# Altium PCB VESC_909.PcbDoc
Units mm, origin at the board's own origin, x right, y up, seen from the top; angles counter-clockwise.
Board outline 69.22 x 40.39 mm, 4 copper layers (Top Layer, Signal Layer 1, Signal Layer 2, Bottom Layer), stack 0.778 mm thick; 111 components, 90 nets, 408 pads, 455 vias.
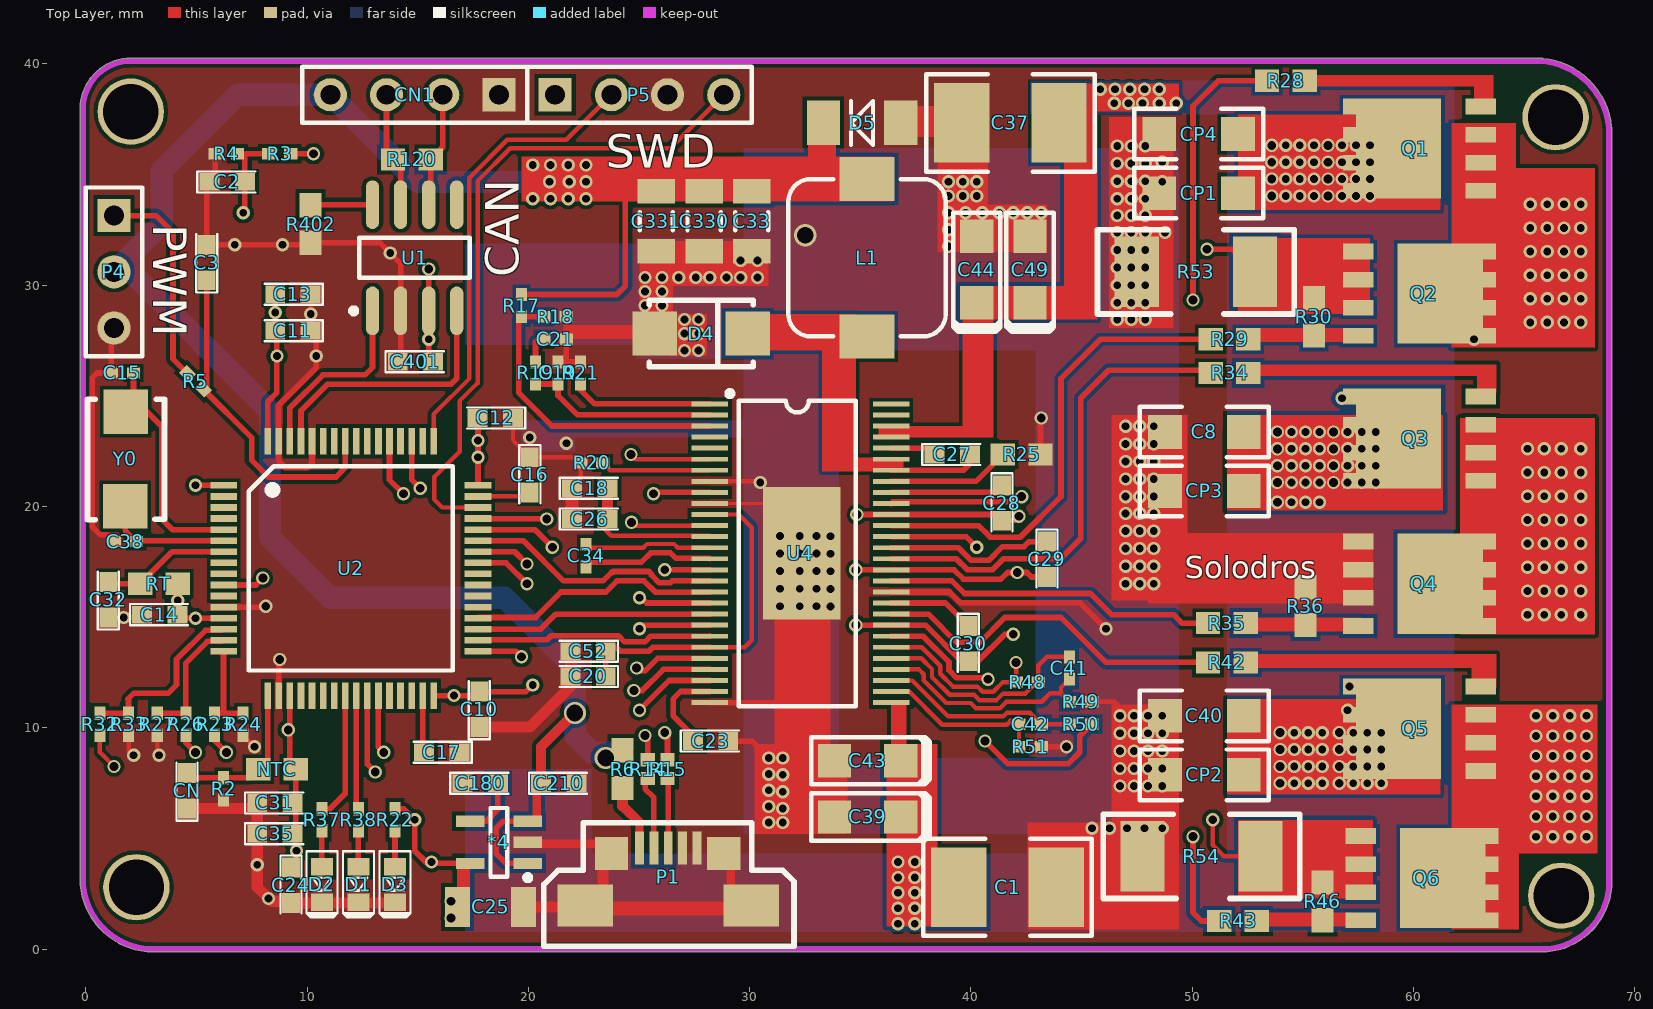
[diagram p0: Top Layer view]
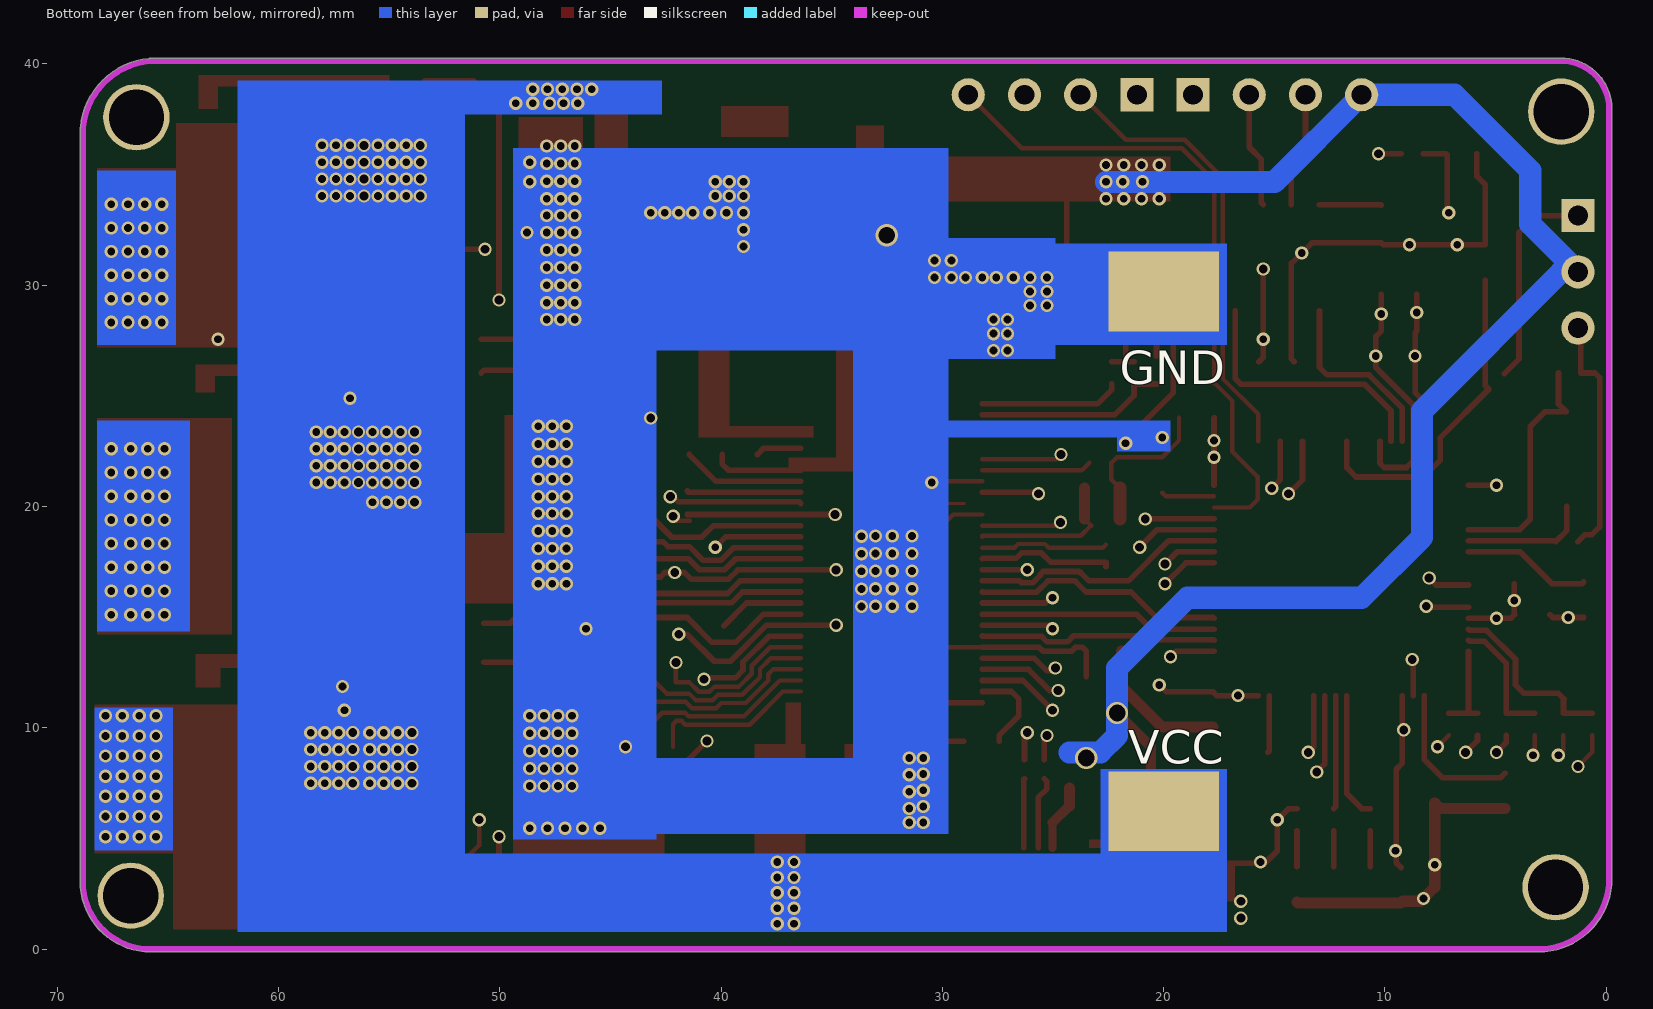
[diagram p1: Bottom Layer view, seen from below]
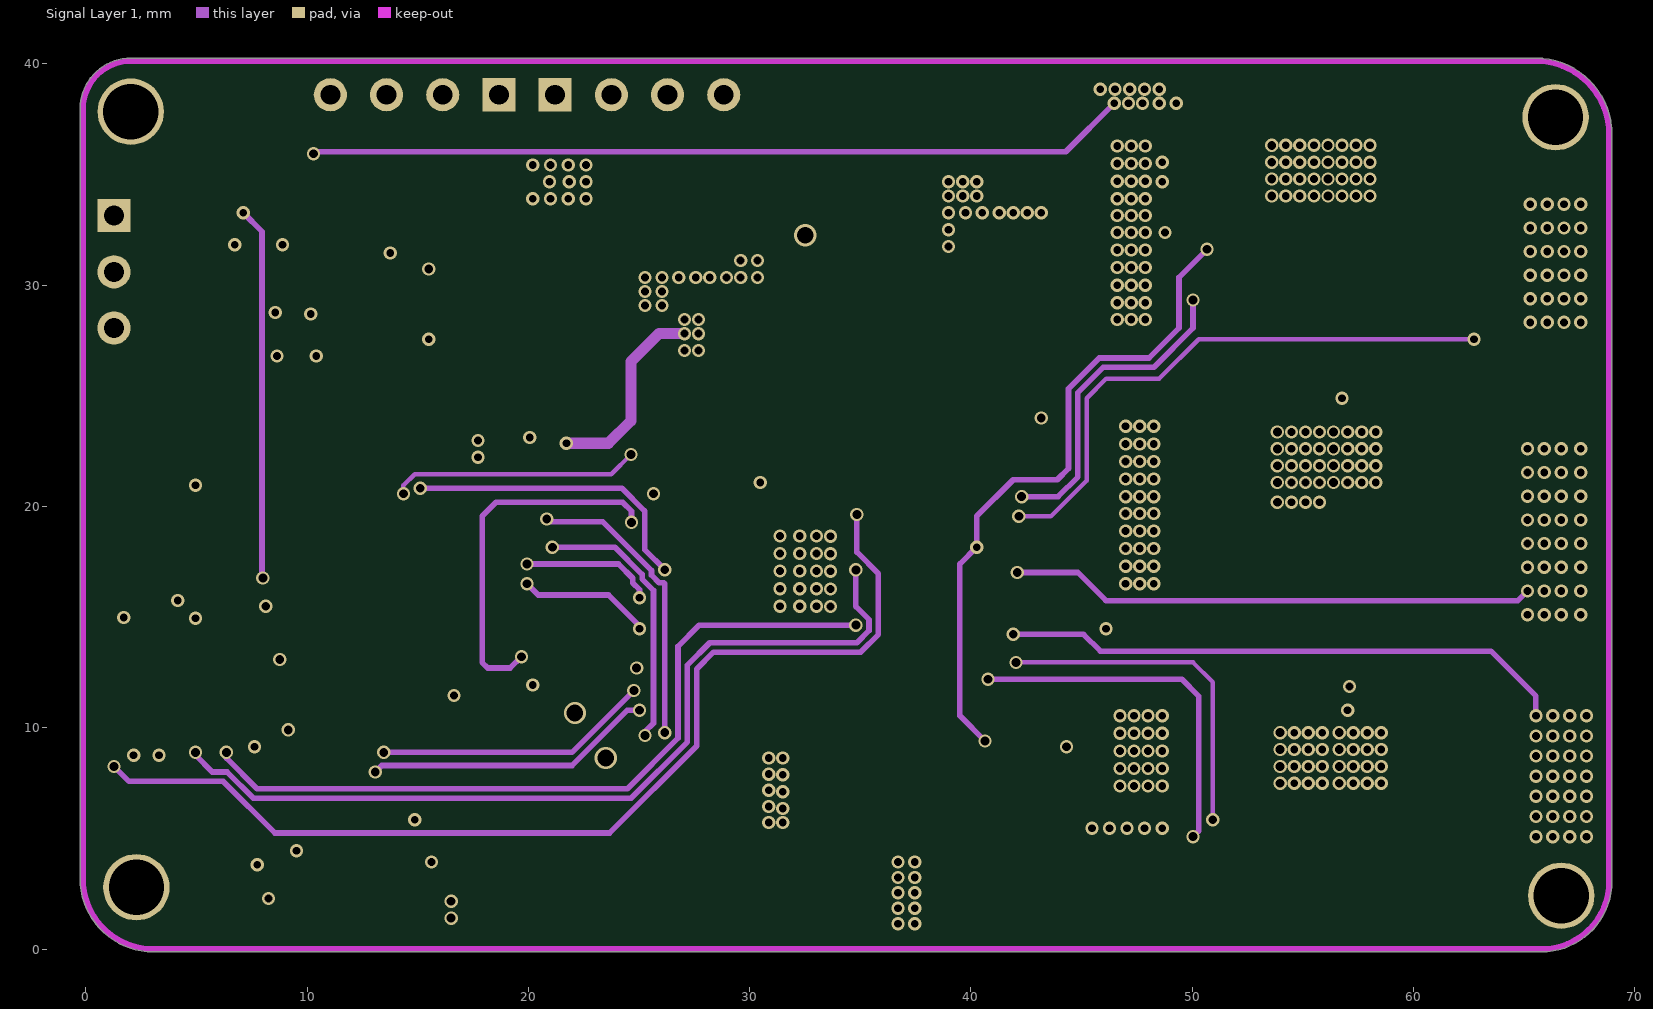
[diagram p2: Signal Layer 1]
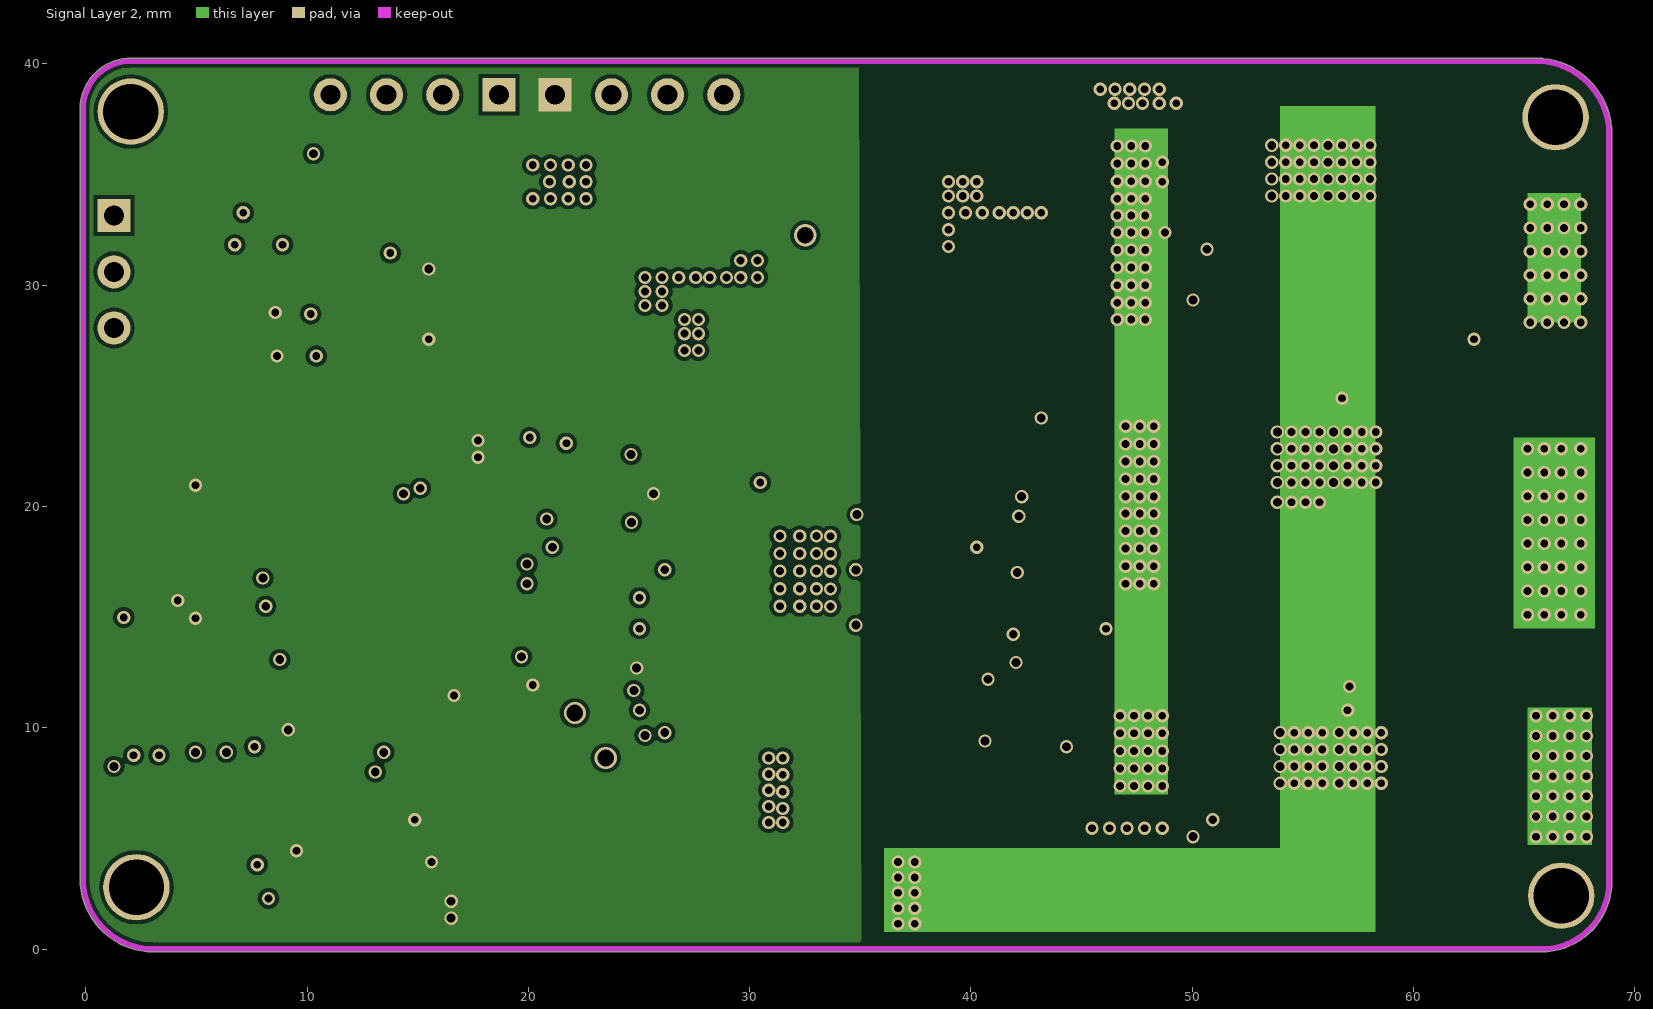
[diagram p3: Signal Layer 2]

## Layer stack, top to bottom
Top Solder: solder mask 0.0102, Solder Resist, Dk 3.5
Top Layer: signal copper 0.0356
Dielectric 1: core 0.254, FR-4, Dk 4.2
Signal Layer 1: signal copper 0.036
Dielectric 3: prepreg 0.127, Dk 4.2
Signal Layer 2: signal copper 0.036
Dielectric 2: core 0.254, Dk 4.2
Bottom Layer: signal copper 0.0356
Bottom Solder: solder mask 0.0102, Solder Resist, Dk 3.5

## Board outline
-0.254,3.175 -0.254,37.973 cw(c2.032,37.973) 2.032,40.259 65.786,40.259 cw(c65.786,40.132) 65.845,40.245 cw(c65.532,36.83) 68.947,37.143 cw(c68.834,37.084) 68.961,37.084 68.961,3.048 cw(c65.786,3.048) 65.786,-0.127 3.048,-0.127 cw(c3.048,3.175)

## Design rules (kind name [scope] priority, off if disabled: settings)
Clearance [All] p1: gap=0.17 ignorepadtopadclearanceinfootprint=FALSE except(0: Arc-Hole Track-Hole SMDPad-Hole THPad-Hole Via-Hole Fill-Hole Poly-Hole Region-Hole Text-Hole)
ComponentClearance [All] p1: gap=0 collisioncheckmode=3 verticalgap=0 showdistances=FALSE
PlaneConnect [All] p1: planeconnectstyle=Direct reliefexpansion=0.508 reliefentries=4 reliefconductorwidth=0.254 reliefairgap=0.254
PolygonConnect [All] p1: connectstyle=Direct reliefconductorwidth=0.254 reliefentries=4 polygonreliefangle="90 Angle" airgapwidth=0.254
RoutingVias [All] p1: holewidth=0.4 width=0.6 viastyle="Through Hole" minholewidth=0.35 minwidth=0.6 maxholewidth=5 maxwidth=66
SolderMaskExpansion [All] p1: expansion=0.102
Width [All] p1: maxlimit=8 minlimit=0.18 preferedwidth=0.254
28 further rules are at their usual default settings.

## Classes and differential pairs
component class TEMP: CN NTC R2
component class STM32F405: C10 C11 C12 C13 C14 C15 C16 C17 C31 C32 C35 C38 P5 RT U2 Y0
component class SN65HVD232: C401 R120 R402 U1
component class MAIN: C2 C3 CN1 D1 D2 D3 P1 P4 R3 R4 R5 R6 R14 R15 R22 R37 R38 R53 R54
component class IRFS7530: Q1 Q2 Q3 Q4 Q5 Q6 R28 R29 R30 R34 R35 R36 R42 R43 R46
component class DRV8302: *4 C1 C8 C18 C19 C20 C21 C23 C24 C25 C26 C27 C28 C29 C30 C33 C34 C37 C39 C40 C41 C42 C43 C44 C49 C52 C180 C210 C330 C331 CP1 CP2 CP3 CP4 D4 D5 L1 R17 R18 R19 R20 R21 R23 R24 R25 R26 R27 R32 R33 R48 R49 R50 R51 U4

## Components (designator, comment, footprint, x,y, rotation, side; value= is the part's Value field where it differs from the comment)
*4 "MIC5219" SOT23-5 18.669,4.826 r0 top
C1 "10UF" 1812 41.656,2.794 r180 top
C2 "CAP" C-0603 5.588,34.671 r0 top
C3 "220PF" C-0603 5.461,30.226 r90 top
C8 "10UF" 1206 50.546,23.368 r0 top
C10 "2.2UF" C-0603 17.78,10.033 r90 top
C11 "2.2UF" C-0603 10.16,27.94 r180 top
C12 "2.2UF" C-0603 19.304,24.003 r180 top
C13 "2.2UF" C-0603 10.16,29.591 r180 top
C14 "2.2UF" C-0603 2.54,15.113 r0 top
C15 "15PF" 0402 1.651,26.035 r180 top
C16 "2.2UF" C-0603 20.066,22.225 r270 top
C17 "2.2UF" C-0603 16.891,8.89 r180 top
C18 "2.2UF" C-0603 21.971,20.828 r0 top
C19 "120PF" 0402 21.336,26.035 r270 top
C20 "2.2UF" C-0603 23.495,12.319 r180 top
C21 "6.8NF" 0402 21.209,27.559 r180 top
C23 "2.2UF" C-0603 27.432,9.398 r0 top
C24 "2.2UF" C-0603 9.271,3.683 r270 top
C25 "10UF" LC-1206 18.288,1.905 r0 top
C26 "2.2UF" C-0603 21.971,19.431 r0 top
C27 "100NF" C-0603 38.354,22.352 r0 top
C28 "220NF" C-0603 41.402,20.955 r270 top
C29 "220NF" C-0603 43.434,18.415 r270 top
C30 "220NF" C-0603 39.878,14.605 r270 top
C31 "2.2UF" C-0603 7.747,6.604 r0 top
C32 "100NF" C-0603 1.016,14.986 r90 top
C33 "10UF" C1206 30.099,32.893 r270 top
C34 "22NF" 0402 22.606,17.78 r90 top
C35 "2.2UF" C-0603 7.747,5.207 r0 top
C37 "10UF" 1812 41.783,37.338 r0 top
C38 "15PF" 0402 1.778,18.415 r180 top
C39 "10UF" C1206A 36.83,5.969 r180 top
C40 "10UF" 1206 50.546,10.541 r180 top
C41 "2.2NF" 0402 44.45,12.7 r270 top
C42 "2.2NF" 0402 42.672,10.16 r0 top
C43 "10UF" C1206A 36.83,8.509 r180 top
C44 "10UF" C1206A 40.259,29.21 r90 top
C49 "10UF" C1206A 42.672,29.21 r90 top
C52 "2.2UF" C-0603 23.495,13.462 r180 top
C180 "100NF" C-0603 17.018,7.493 r0 top
C210 "10UF" C-0603 20.574,7.493 r0 top
C330 "10UF" C1206 27.94,32.893 r270 top
C331 "10UF" C1206 25.781,32.893 r270 top
C401 "2.2UF" C-0603 14.097,26.543 r0 top
CN "2.2UF" C-0603 4.572,6.35 r90 top
CN1 "HEAD-1X4" H-1X4 18.669,38.608 r180 top
CP1 "10UF" 1206 50.292,34.163 r180 top
CP2 "10UF" 1206 50.546,7.874 r180 top
CP3 "10UF" 1206 50.546,20.701 r180 top
CP4 "10UF" 1206 50.292,36.83 r180 top
D1 "红色" LED0603 12.319,2.921 r270 top
D2 "绿色" LED0603 10.668,2.921 r270 top
D3 "红色" LED0603 13.97,2.921 r270 top
D4 "D Schottky" LC-SMA(DO-214AC)_S1 27.813,27.813 r180 top
D5 "TVS" DIODE-1206 36.83,37.338 r180 top
L1 "Inductor" L-SMD-7 35.306,31.242 r90 top
NTC "NTC" 0603-2 8.636,8.128 r0 top
P1 "MICRO_USB" MicroUSB 25.019,4.572 r0 top
P4 "Header 3" HDR3X1_A 1.27,33.147 r270 top
P5 "Header 4" H-1X4 21.209,38.608 r0 top
Q1 "CSD18540Q5B" SON5X6 57.404,33.909 r0 top
Q2 "CSD18540Q5B" SON5X6 63.136,31.876 r180 top
Q3 "CSD18540Q5B" SON5X6 57.404,20.803 r0 top
Q4 "CSD18540Q5B" SON5X6 63.136,18.769 r180 top
Q5 "CSD18540Q5B" SON5X6 57.404,7.696 r0 top
Q6 "CSD18540Q5B" SON5X6 63.246,5.461 r180 top
R2 "10K" 0402 6.223,7.239 r90 top
R3 "39K" 0402 8.763,35.941 r180 top
R4 "2.2K" 0402 6.35,35.941 r0 top
R5 "2.2K" 0402 4.953,25.654 r135 top
R6 "0R" 0603-2 24.257,8.128 r90 top
R14 "22R" LC-0402 25.4,8.128 r90 top
R15 "22R" LC-0402 26.289,8.128 r90 top
R17 "18K" 0402 19.685,29.083 r90 top
R18 "3K3" 0402 21.209,28.575 r180 top
R19 "15K" 0402 20.32,26.035 r90 top
R20 "10K" 0402 22.86,21.971 r180 top
R21 "220K" 0402 22.352,26.035 r270 top
R22 "220R" 0402 13.97,5.842 r90 top
R23 "39K" 0402 5.817,10.16 r90 top
R24 "2.2K" 0402 7.112,10.16 r90 top
R25 "1M" 0603-2 42.291,22.352 r180 top
R26 "39K" 0402 4.521,10.16 r90 top
R27 "2.2K" 0402 3.226,10.16 r90 top
R28 "10R" 0603-2 54.229,39.243 r0 top
R29 "10R" 0603-2 51.689,27.559 r0 top
R30 "39K" 0603-2 55.499,28.575 r90 top
R32 "39K" 0402 0.635,10.16 r90 top
R33 "2.2K" 0402 1.93,10.16 r90 top
R34 "10R" 0603-2 51.689,26.035 r0 top
R35 "10R" 0603-2 51.562,14.732 r0 top
R36 "39K" 0603-2 55.118,15.494 r270 top
R37 "220R" 0402 10.668,5.842 r90 top
R38 "220R" 0402 12.319,5.842 r90 top
R42 "10R" 0603-2 51.562,12.954 r0 top
R43 "10R" 0603-2 52.07,1.27 r0 top
R46 "39K" 0603-2 55.88,2.159 r90 top
R48 "100R" 0402 42.545,12.065 r0 top
R49 "100R" 0402 44.958,11.176 r180 top
R50 "100R" 0402 44.958,10.16 r180 top
R51 "100R" 0402 42.672,9.144 r180 top
R53 "0.001R" 2512 54.61,32.512 r180 top
R54 "0.001R" 2512 54.864,6.096 r180 top
R120 "120R" 0603-2 14.732,35.687 r180 top
R402 "10K" 0603-2 10.16,32.766 r270 top
RT "10K" 0603-2 3.302,16.51 r0 top
U1 "SN65HVD232" SOIC8_N 14.859,31.242 r90 top
U2 "STM32F4R" STM32F4R 6.223,20.955 r0 top
U4 "DRV8302" HTSSOP-56 28.194,24.638 r270 top
Y0 "8MHz" XTAL_5032 3.556,19.431 r90 top

## Footprints (in the part's own frame and the unit in brackets; to place one, negate y for a bottom-side part, rotate by r counter-clockwise, add the part's x,y. Pads: shape width x height; smd on the part's side, far side on the other; paste and mask are expansions set on the pad)
0402 [mm] "Chip Capacitor, Body 1.0x0.5mm, IPC High Density"
  rect 0.6x0.5 smd: 1(-0.5,0) 2(0.5,0)
  body extent -0.55,-0.3 0.55,0.3, height 1.3
0603-2 [mm] "贴片无丝印"
  rect 1.1x1 smd: 1(-0.85,0) 2(0.85,0)
1206 [mil] "贴片元件"
  rect 60x60 smd: 1(-70,0) 2(70,0)
  silkscreen extent -115,-45 115,45, body extent -75,-35 75,35, height 39
1812 [mm] "保险丝"
  rect 2.5x3.6 smd: 1(-2.2,0) 2(2.2,0)
  silkscreen extent -3.81,-2.2 3.81,2.2, body extent -2.54,-1.65 2.67,1.65, height 1.2
2512 [mm]
  rect 2x3.2 smd: 1(1.778,1.905) 2(7.112,1.905)
  silkscreen extent 0,0 8.89,3.81
C1206 [mm] "Chip Capacitor, Body 3.2x1.6mm, IPC High Density"
  rect 1.1x1.7 smd: 1(-1.35,0) 2(1.35,0)
  silkscreen extent -0.4,-0.75 0.4,0.75, body extent -1.7,-0.9 1.7,0.9, height 1.3
C1206A [mm]
  rect 1.5x1.5 smd: 1(0,0) 2(3,0)
  silkscreen extent -1.32,-1.07 4.06,1.07, body extent -0.1,-0.81 3.1,0.79, height 0.95
C-0603 [mm]
  rect 0.9x0.8 smd: 1(0,0) 2(1.6,0)
  silkscreen extent -0.55,-0.48 2.08,0.47
DIODE-1206 [mm] "玻璃封装二极管"
  rect 1.5x2 smd: 1(0,0) 2(3.5,0)
  silkscreen extent 1.25,-1 2.25,1
H-1X4 [mm] "Connector; Header; 4 Position"
  rect 1.5x1.5 hole 0.9: 1(0,0)
  round 1.5 hole 0.9: 2(2.54,0) 3(5.08,0) 4(7.62,0)
  silkscreen extent -1.27,-1.27 8.89,1.27
HDR3X1_A [mm] "Connector; Header; 3 Position"
  rect 1.5x1.5 hole 0.9: 1(0,0)
  round 1.5 hole 0.9: 2(2.54,0) 3(5.08,0)
  silkscreen extent -1.27,-1.27 6.35,1.27
HTSSOP-56 [mm]
  rect 0.22x1.65 smd: 1(0,0) 2(0.5,0) 3(1,0) 4(1.5,0) 5(2,0) 6(2.5,0) 7(3,0) 8(3.5,0) 9(4,0) 10(4.5,0) 11(5,0) 12(5.5,0) 13(6,0) 14(6.5,0) 15(7,0) 16(7.5,0) 17(8,0) 18(8.5,0) 19(9,0) 20(9.5,0) 21(10,0) 22(10.5,0) 23(11,0) 24(11.5,0) 25(12,0) 26(12.5,0) 27(13,0) 28(13.5,0) 29(13.5,8.2) 30(13,8.2) 31(12.5,8.2) 32(12,8.2) 33(11.5,8.2) 34(11,8.2) 35(10.5,8.2) 36(10,8.2) 37(9.5,8.2) 38(9,8.2) 39(8.5,8.2) 40(8,8.2) 41(7.5,8.2) 42(7,8.2) 43(6.5,8.2) 44(6,8.2) 45(5.5,8.2) 46(5,8.2) 47(4.5,8.2) 48(4,8.2) 49(3.5,8.2) 50(3,8.2) 51(2.5,8.2) 52(2,8.2) 53(1.5,8.2) 54(1,8.2) 55(0.5,8.2) 56(0,8.2)
  rect 6x3.5 smd: 57(6.75,4.15)
  silkscreen extent -0.59,0.78 13.66,6.6
L-SMD-7 [mm] "贴片电感7*7"
  rect 2x2.5 smd: 1(-3.556,0) 2(3.556,0)
  silkscreen extent -3.56,-3.56 3.56,3.56, body extent -3.56,-3.56 3.56,3.56, height 4
LC-0402 [mm]
  rect 0.6x0.65 smd mask+0.051: 1(-0.425,0) 2(0.425,0)
LC-1206 [mm]
  rect 1.13x1.8 smd: 1(-1.49,0) 2(1.49,0)
LC-SMA(DO-214AC)_S1 [mm]
  rect 2x2 smd: 1(2.1,0) 2(-2.1,0)
  silkscreen extent -2.35,-1.5 2.35,1.5
LED0603 [mm]
  rect 0.8x1 smd: 1(-0.8,0) 2(0.8,0)
  silkscreen extent -1.5,-0.7 1.5,0.7
MicroUSB [mm]
  rect 2.5x1.9 smd: 0(-2.45,-2.6) 0(5.05,-2.6)
  rect 1.5x1.5 smd: 0(-1.27,-0.254) 0(3.81,-0.254)
  rect 0.4x1.5 smd: 1(0,0) 2(0.65,0) 3(1.3,0) 4(1.95,0) 5(2.6,0)
  silkscreen extent -4.32,-4.44 6.98,1.14
SOIC8_N [mm] "8-Pin Small Outline Integrated Circuit Package (SOIC8), IPC Medium Density"
  oval 2.2x0.6 smd: 1(-2.4,1.905) 2(-2.4,0.635) 3(-2.4,-0.635) 4(-2.4,-1.905) 5(2.4,-1.905) 6(2.4,-0.635) 7(2.4,0.635) 8(2.4,1.905)
  silkscreen extent -2.52,-2.5 0.9,2.88, body extent -1.95,-2.45 1.95,2.45, height 1.75
SON5X6 [mm]
  rect 1.372x0.71 smd: 1(5.636,0.355) 1(5.636,1.625) 1(5.636,2.895) 4(5.636,4.165)
  rect 0.59x0.71 smd: 8(-0.295,0.355) 8(-0.295,1.625) 8(-0.295,2.895) 8(-0.295,4.165)
  rect 3.85x4.52 smd: 8(1.925,2.26)
SOT23-5 [mm] "e.g. CAT6912, ADP150, AD8605, 5-Leads"
  rect 1.3x0.5 smd: 1(1.3,-0.95) 2(1.3,0) 3(1.3,0.95) 4(-1.3,0.95) 5(-1.3,-0.95)
  silkscreen extent -0.38,-1.72 1.43,1.55
STM32F4R [mm]
  rect 1.2x0.3 smd: 1(0,0) 2(0,-0.5) 3(0,-1) 4(0,-1.5) 5(0,-2) 6(0,-2.5) 7(0,-3) 8(0,-3.5) 9(0,-4) 10(0,-4.5) 11(0,-5) 12(0,-5.5) 13(0,-6) 14(0,-6.5) 15(0,-7) 16(0,-7.5) 33(11.5,-7.5) 34(11.5,-7) 35(11.5,-6.5) 36(11.5,-6) 37(11.5,-5.5) 38(11.5,-5) 39(11.5,-4.5) 40(11.5,-4) 41(11.5,-3.5) 42(11.5,-3) 43(11.5,-2.5) 44(11.5,-2) 45(11.5,-1.5) 46(11.5,-1) 47(11.5,-0.5) 48(11.5,0)
  rect 0.3x1.2 smd: 17(2,-9.5) 18(2.5,-9.5) 19(3,-9.5) 20(3.5,-9.5) 21(4,-9.5) 22(4.5,-9.5) 23(5,-9.5) 24(5.5,-9.5) 25(6,-9.5) 26(6.5,-9.5) 27(7,-9.5) 28(7.5,-9.5) 29(8,-9.5) 30(8.5,-9.5) 31(9,-9.5) 32(9.5,-9.5) 49(9.5,2) 50(9,2) 51(8.5,2) 52(8,2) 53(7.5,2) 54(7,2) 55(6.5,2) 56(6,2) 57(5.5,2) 58(5,2) 59(4.5,2) 60(4,2) 61(3.5,2) 62(3,2) 63(2.5,2) 64(2,2)
  silkscreen extent 1.14,-8.36 10.36,0.87
XTAL_5032 [mm]
  rect 2x2 smd: 1(4.851,1.753) 2(0.584,1.778)
  silkscreen extent -0.03,0 5.41,3.48

## Part data
C1 C3 C8 C10 C11 C12 C13 C14 C15 C16 C17 C18 C19 C20 C21 C23 C24 C26 C27 C28 C29 C30 C31 C32 C34 C35 C37 C38 C39 C40 C41 C42 C43 C44 C49 C52 C180 C210 C401 CN CP1 CP2 CP3 CP4: library part CAP, "Capacitor"
C2: "Capacitor"
C25 C33 C330 C331: library part "Cap Pol1", "Polarized Capacitor (Radial)"
CN1 P5: "Header, 4-Pin"
D1 D2 D3: library part LED2, "Typical RED, GREEN, YELLOW, AMBER GaAs LED"
D4: "Schottky Diode"
D5: "TVS保护"
NTC R2 R3 R4 R5 R6 R14 R15 R17 R18 R19 R20 R21 R22 R23 R24 R25 R26 R27 R28 R29 R30 R32 R33 R34 R35 R36 R37 R38 R42 R43 R46 R48 R49 R50 R51 R53 R54 R120 R402 RT: library part Res1, "贴片电阻"
P1: library part MINI_USB
P4: library part "Header 3_1", "接插件"
U1: library part AT24C02_1, "CAN收发器"
U4: "无刷直流驱动器"
Y0: library part XTAL, "Crystal Oscillator"

## Free pads (board coordinates)
  round 3 hole 2.5: 0(2.032,37.846) 1(2.286,2.794) 2(66.675,2.413) 3(66.421,37.592)
  rect 5x3.6 smd far side: 4(20,6.223) 5(20,29.718)

## Via types
v1: diameter 0.6, hole 0.35, Top Layer to Bottom Layer, 382 vias
v2: diameter 0.6, hole 0.4, Top Layer to Bottom Layer, 70 vias
v3: diameter 1, hole 0.75, Top Layer to Bottom Layer, 3 vias

## Nets (pads, with @x,y where several pads share a name; then routed paths per layer and width w, separated by ;. In a path a pad name is that pad's centre, name@x,y a point inside that pad or via, vN(x,y) a via of type N, cw(c..) or ccw(c..) an arc to the next point about the centre after c; other vN are vias at no path point)
+5V: *4.1 *4.3 C33.1 C210.1 C330.1 C331.1 CN1.4 D5.2 L1.2 P4.2 R6.2 R17.2 | length 83.3
  Top Layer w0.254: R17.2 23.995,29.583 24.384,29.972 24.384,33.909 24.718,34.243 C331.1 ; *4.1 18.984,3.876 18.542,4.318 18.542,5.461 18.857,5.776 *4.3
  Top Layer w0.45: C210.1 20.574,9.144 v3(22.098,10.668)
  Bottom Layer w1: v1(22.606,34.671) v1(21.844,34.671) v1(20.955,34.671) 14.986,34.671 CN1.4 6.858,38.608 3.429,35.179 3.429,32.766 P4.2 2.032,30.607 8.319,24.32 8.319,18.605 11.049,15.875 18.923,15.875 22.098,12.7 v3(22.098,10.668) 22.098,9.652 22.86,8.89 24.257,8.89
  other v1: 20.193,33.909 20.997,33.909 21.802,33.909 22.606,33.909 20.193,35.433 20.997,35.433 21.802,35.433 22.606,35.433
  other v3: 23.495,8.636
GND: *4.2 C1.1 C2.1 C3.2 C8.1 C10.1 C11.1 C12.1 C13.1 C14.1 C15.2 C16.1 C17.1 C18.1 C19.1 C20.2 C21.1 C23.2 C24.2 C25.2 C26.1 C31.1 C32.1 C33.2 C35.1 C37.1 C38.2 C39.2 C40.2 C43.2 C44.2 C49.2 C52.2 C180.1 C210.2 C330.2 C331.2 C401.1 CN1.1 CN.1 CP1.2 CP2.2 CP3.2 CP4.2 D1.2 D2.2 D3.2 D4.1 D5.1 P1.0 P1.4 P1.5 P4.3 P5.3 pad.5 Q4.1 R2.1 R4.1 R18.1 R20.2 R21.1 R24.1 R25.1 R27.1 R33.1 R36.1 R49.1 R51.1 R53.2 R54.2 R402.2 U1.2 U2.12 U2.18 U2.60 U2.63 U4.8 U4.10 U4.28 U4.39 U4.57 | length 109.3
  Top Layer w0.2: R33.1 1.93,8.992 v1(2.159,8.763) ; R27.1 3.226,8.839 v1(3.302,8.763) ; R24.1 7.112,9.652 v1(7.62,9.144) ; C12.1 19.304,22.987 C16.1 22.106,22.225 R20.2 22.36,21.217 C18.1 ; U4.8 30.424,21.138 v1(30.48,21.082) ; R49.1 46.482,11.176 46.736,10.922 ; v1@46.545,9.144 v1(46.736,8.954)
  Top Layer w0.254: C32.1 2.413,14.986 C14.1 ; P4.3 1.151,27.948 C15.2 0.508,26.035 0.297,25.824 0.297,19.076 0.655,18.718 0.975,18.718 C38.2 ; R4.1 5.85,34.933 C2.1 5.461,34.544 C3.2 10.07,31.826 R402.2 13.296,31.916 14.224,30.988 U1.2 14.224,26.67 C401.1 ; U2.12 8.089,15.455 v2(8.128,15.494) ; U2.18 8.723,13.041 v2(8.763,13.081) ; C13.1 C11.1 10.414,27.686 10.414,26.289 8.723,24.598 U2.63 8.723,22.054 9.017,21.76 10.033,21.76 10.223,21.95 U2.60 ; C19.1 21.717,26.535 ; R18.1 C21.1 21.709,26.543 21.717,26.535 ; R21.1 21.717,26.535 ; U4.28 31.331,11.138 31.369,11.176 ; C23.2 30.099,9.398 v1(30.861,8.636) ; U4.39 39.039,16.138 39.533,15.644 44.935,15.644 v1(46.101,14.478) ; R25.1 43.141,23.964 v2(43.18,24.003) ; R51.1 v2(44.323,9.144)
  Top Layer w0.5: CN.1 7.493,6.35 C31.1 C35.1 7.747,2.794 8.382,2.159 9.195,2.159 C24.2 13.932,2.083 D3.2 ; C10.1 20.066,10.033 21.895,11.862 C20.2 ; C52.2 21.895,12.751 21.971,12.827
  Top Layer w0.6: C26.1 C18.1
  Signal Layer 1 w0.5: v1(21.717,22.86) 23.622,22.86 24.638,23.876 24.638,26.543 25.908,27.813 v1(27.051,27.813)
  other v1: 8.255,2.286 7.747,3.81 45.466,5.461 46.26,5.461 47.053,5.461 47.847,5.461 48.641,5.461 30.861,5.715 31.496,5.715 31.496,6.35 30.861,6.445 31.496,7.112 30.861,7.175 46.736,7.366 47.371,7.366 48.006,7.366 48.641,7.366 31.496,7.874 30.861,7.906 46.736,8.16 47.371,8.16 48.006,8.16 48.641,8.16 31.496,8.636 47.371,8.954 48.006,8.954 48.641,8.954 46.736,9.747 47.371,9.747 48.006,9.747 48.641,9.747 46.736,10.541 47.371,10.541 48.006,10.541 48.641,10.541 1.714,14.986 33.655,15.481 31.369,15.494 32.258,15.494 33.02,15.494 31.369,16.288 32.258,16.288 33.02,16.288 33.655,16.275 46.99,16.51 47.625,16.51 48.26,16.51 31.369,17.081 32.258,17.081 33.02,17.081 33.655,17.068 46.99,17.304 47.625,17.304 48.26,17.304 33.655,17.862 31.369,17.875 32.258,17.875 33.02,17.875 46.99,18.098 47.625,18.098 48.26,18.098 33.655,18.656 31.369,18.669 32.258,18.669 33.02,18.669 46.99,18.891 47.625,18.891 48.26,18.891 46.99,19.685 47.625,19.685 48.26,19.685 46.99,20.447 47.625,20.447 48.26,20.447 46.99,21.241 47.625,21.241 48.26,21.241 46.99,22.034 47.625,22.034 48.26,22.034 46.99,22.828 47.625,22.828 48.26,22.828 20.066,23.114 46.99,23.622 47.625,23.622 48.26,23.622 10.414,26.797 27.051,27.051 27.686,27.051 27.686,27.813 27.051,28.448 27.686,28.448 46.609,28.448 47.244,28.448 47.879,28.448 10.16,28.702 25.273,29.083 26.035,29.083 46.609,29.21 47.244,29.21 47.879,29.21 25.273,29.718 26.035,29.718 46.609,30.004 47.244,30.004 47.879,30.004 25.273,30.353 26.035,30.353 26.797,30.353 27.559,30.353 28.194,30.353 28.956,30.353 29.591,30.353 30.353,30.353 46.609,30.797 47.244,30.797 47.879,30.797 29.591,31.115 30.353,31.115 13.76,31.452 46.609,31.591 47.244,31.591 47.879,31.591 38.989,31.75 6.731,31.826 8.89,31.826 46.609,32.385 47.244,32.385 47.879,32.385 48.768,32.385 38.989,32.512 46.609,33.147 47.244,33.147 47.879,33.147 38.989,33.274 39.751,33.274 40.513,33.274 41.275,33.274 41.91,33.274 42.545,33.274 43.18,33.274 46.609,33.909 47.244,33.909 47.879,33.909 38.989,34.036 39.624,34.036 40.259,34.036 38.989,34.671 39.624,34.671 40.259,34.671 48.641,34.671 46.609,34.703 47.244,34.703 47.879,34.703 46.609,35.496 47.244,35.496 47.879,35.496 48.641,35.56 46.609,36.29 47.244,36.29 47.879,36.29
  other v3: 32.512,32.258
Net*4_4: *4.4 C180.2 | length 2.7
  Top Layer w0.254: *4.4 18.095,5.776 18.669,6.35 18.618,6.401 C180.2
NetC1_2: C1.2 C8.2 C37.2 C39.1 C40.1 C43.1 C44.1 C49.1 CP1.1 CP2.1 CP3.1 CP4.1 pad.4 Q1.8 Q3.8 Q5.8 R3.1 U4.29 U4.53 U4.54 | length 38.2
  Top Layer w0.254: R3.1 v2(10.287,35.941)
  Signal Layer 1 w0.254: v2(10.287,35.941) 10.376,36.03 44.285,36.03 v1(46.482,38.227)
  other v1: 36.703,1.143 37.465,1.143 36.703,1.841 37.465,1.841 36.703,2.54 37.465,2.54 36.703,3.238 37.465,3.238 36.703,3.937 37.465,3.937 54.61,7.493 55.245,7.493 55.88,7.493 57.277,7.493 57.912,7.493 58.547,7.493 54.61,8.255 55.245,8.255 55.88,8.255 57.277,8.255 57.912,8.255 58.547,8.255 54.61,9.017 55.245,9.017 55.88,9.017 57.277,9.017 57.912,9.017 58.547,9.017 54.61,9.779 55.245,9.779 55.88,9.779 57.277,9.779 57.912,9.779 58.547,9.779 57.023,10.795 57.109,11.861 54.483,20.193 55.118,20.193 55.753,20.193 54.483,21.082 55.118,21.082 55.753,21.082 57.023,21.082 57.658,21.082 58.293,21.082 54.483,21.844 55.118,21.844 55.753,21.844 57.023,21.844 57.658,21.844 58.293,21.844 54.483,22.606 55.118,22.606 55.753,22.606 57.023,22.606 57.658,22.606 58.293,22.606 54.483,23.368 55.118,23.368 55.753,23.368 57.023,23.368 57.658,23.368 58.293,23.368 56.769,24.892 54.229,34.036 54.864,34.036 55.499,34.036 56.769,34.036 57.404,34.036 58.039,34.036 54.229,34.798 54.864,34.798 55.499,34.798 56.769,34.798 57.404,34.798 58.039,34.798 54.229,35.56 54.864,35.56 55.499,35.56 56.769,35.56 57.404,35.56 58.039,35.56 54.229,36.322 54.864,36.322 55.499,36.322 56.769,36.322 57.404,36.322 58.039,36.322 47.117,38.227 47.752,38.227 48.514,38.227 49.276,38.227 45.847,38.862 46.514,38.862 47.18,38.862 47.847,38.862 48.514,38.862
  other v2: 53.975,7.493 56.642,7.493 53.975,8.255 56.642,8.255 53.975,9.017 56.642,9.017 53.975,9.779 56.642,9.779 53.848,20.193 53.848,21.082 56.388,21.082 53.848,21.844 56.388,21.844 53.848,22.606 56.388,22.606 53.848,23.368 56.388,23.368 53.594,34.036 56.134,34.036 53.594,34.798 56.134,34.798 53.594,35.56 56.134,35.56 53.594,36.322 56.134,36.322
NetC2_2: C2.2 R3.2 R4.2 U2.10 | length 22.5
  Top Layer w0.254: U2.10 7.692,16.455 v2(8.001,16.764) ; v1(7.112,33.274) 7.188,33.35 C2.2 7.188,35.89 7.239,35.941 R3.2
  Signal Layer 1 w0.254: v1(7.112,33.274) 7.963,32.423 7.963,16.802 v2(8.001,16.764)
NetC3_1: C3.1 R5.1 U2.57 | length 15
  Top Layer w0.254: C3.1 5.461,25.455 R5.1 7.493,23.114 7.493,22.098 8.255,21.336 11.303,21.336 11.723,21.756 U2.57
NetC15_1: C15.1 U2.5 Y0.1 | length 11
  Top Layer w0.254: C15.1 2.151,24.63 Y0.1 2.769,24.282 3.429,23.622 3.429,19.431 3.905,18.955 U2.5
NetC16_2: C16.2 U2.47 | length 2.4
  Top Layer w0.2: U2.47 19.896,20.455 C16.2
NetC17_2: C17.2 U2.31 | length 2.6
  Top Layer w0.254: U2.31 15.223,8.958 C17.2
NetC18_2: C18.2 C26.2 U4.13 | length 7
  Top Layer w0.2: C26.2 23.279,19.139 23.744,18.674 28.194,18.674 U4.13
  Top Layer w0.5: C26.2 C18.2
NetC19_2: C19.2 R19.1 U4.2 | length 8.8
  Top Layer w0.254: R19.1 C19.2 21.336,25.019 22.217,24.138 U4.2
NetC20_1: C20.1 C52.1 U4.11 U4.23 | length 15.3
  Top Layer w0.2: U4.23 29.767,13.638 29.909,13.779 30.099,13.97 30.099,19.05 29.511,19.638 U4.11
  Top Layer w0.254: C20.1 C52.1 23.671,13.638 23.989,13.638 24.17,13.457 25.442,13.457 25.623,13.638 U4.23
NetC21_2: C21.2 R19.2 | length 1.1
  Top Layer w0.254: R19.2@20.32,26.797 20.32,27.432 20.447,27.559 C21.2
NetC23_1: C23.1 U4.27 | length 4.1
  Top Layer w0.254: C23.1 27.432,9.652 26.543,10.541 26.543,11.303 26.878,11.638 U4.27
NetC27_1: C27.1 U4.52 | length 2.1
  Top Layer w0.254: U4.52 38.068,22.638 C27.1
NetC27_2: C27.2 D4.2 L1.1 U4.50 U4.51 | length 4.1
  Top Layer w0.254: U4.50 39.672,21.638 39.954,21.92 C27.2
NetC28_1: C28.1 U4.48 | length 10.2
  Top Layer w0.254: C28.1@41.529,20.701 C28.1@41.466,20.638 ; C28.1@41.466,20.638 U4.48 C28.1@41.466,20.638
NetC28_2: C28.2 Q1.1 Q2.8 R32.1 U4.46 | length 82.7
  Top Layer w0.2: R32.1 0.635,8.89 v2(1.27,8.255) ; C28.2 41.961,19.355 v2(42.164,19.558)
  Top Layer w0.254: v2@34.798,19.685 v2(34.845,19.638) U4.46 C28.2@41.529,19.638
  Signal Layer 1 w0.2: v2(42.164,19.558) 43.614,19.558 45.228,21.172 45.228,24.892 46.117,25.781 48.514,25.781 50.292,27.559 v1(62.738,27.559)
  Signal Layer 1 w0.254: v2(1.27,8.255) 1.948,7.577 6.21,7.577 8.542,5.245 23.672,5.245 27.607,9.18 27.607,12.656 28.367,13.416 35.02,13.416 35.819,14.215 35.819,16.961 34.845,17.935 v2(34.845,19.638)
  other v1: 65.278,28.321 66.04,28.321 66.802,28.321 67.564,28.321 65.278,29.388 66.04,29.388 66.802,29.388 67.564,29.388 65.278,30.455 66.04,30.455 66.802,30.455 67.564,30.455 65.278,31.521 66.04,31.521 66.802,31.521 67.564,31.521 65.278,32.588 66.04,32.588 66.802,32.588 67.564,32.588 65.278,33.655 66.04,33.655 66.802,33.655 67.564,33.655
NetC29_1: C29.1 U4.43 | length 7.6
  Top Layer w0.254: U4.43 39.438,18.138 40.012,17.564 40.805,17.564 41.425,18.184 42.406,18.184 42.637,18.415 C29.1
NetC29_2: C29.2 Q3.1 Q4.8 R26.1 U4.41 | length 73.4
  Top Layer w0.254: R26.1 4.521,9.322 v2(4.953,8.89) ; v2@34.671,17.145 34.678,17.138 v2(34.798,17.138) U4.41 39.238,17.138 39.66,16.716 41.354,16.716 41.656,17.018 v2(42.094,17.018) 42.531,17.018 42.734,16.815 C29.2
  Signal Layer 1 w0.254: v2(4.953,8.89) 4.953,8.763 5.715,8.001 6.385,8.001 7.571,6.815 24.642,6.815 27.183,9.356 27.183,12.832 28.194,13.843 34.847,13.843 35.395,14.391 35.395,14.885 34.798,15.482 v2(34.798,17.138) ; v2(42.094,17.018) 44.831,17.018 46.101,15.748 64.716,15.748 v1(65.151,16.183)
  other v1: 65.151,15.113 65.913,15.113 66.675,15.113 67.564,15.113 65.913,16.183 66.675,16.183 67.564,16.183 65.151,17.254 65.913,17.254 66.675,17.254 67.564,17.254 65.151,18.324 65.913,18.324 66.675,18.324 67.564,18.324 65.151,19.395 65.913,19.395 66.675,19.395 67.564,19.395 65.151,20.465 65.913,20.465 66.675,20.465 67.564,20.465 65.151,21.536 65.913,21.536 66.675,21.536 67.564,21.536 65.151,22.606 65.913,22.606 66.675,22.606 67.564,22.606
NetC30_1: C30.1 U4.38 | length 3.9
  Top Layer w0.254: U4.38 38.845,15.638 C30.1
NetC30_2: C30.2 Q5.1 Q6.8 R23.1 U4.36 | length 69.9
  Top Layer w0.254: R23.1 5.817,9.423 v2(6.35,8.89) ; v2@34.671,14.605 34.704,14.638 v2(34.798,14.638) U4.36 37.94,14.638 39.573,13.005 C30.2 40.31,13.005 41.529,14.224 v2(41.91,14.224)
  Signal Layer 1 w0.254: v2(6.35,8.89) 6.35,8.636 7.747,7.239 24.466,7.239 26.759,9.532 26.759,13.678 27.719,14.638 v2(34.798,14.638) ; v2(41.91,14.224) 45.085,14.224 45.847,13.462 63.5,13.462 65.532,11.43 v1(65.532,10.541)
  other v1: 65.532,5.08 66.294,5.08 67.056,5.08 67.818,5.08 65.532,5.99 66.294,5.99 67.056,5.99 67.818,5.99 65.532,6.9 66.294,6.9 67.056,6.9 67.818,6.9 65.532,7.81 66.294,7.81 67.056,7.81 67.818,7.81 65.532,8.721 66.294,8.721 67.056,8.721 67.818,8.721 65.532,9.631 66.294,9.631 67.056,9.631 67.818,9.631 66.294,10.541 67.056,10.541 67.818,10.541
NetC32_2: C32.2 RT.1 U2.7 | length 5.8
  Top Layer w0.254: C32.2 1.092,16.51 RT.1 3.897,17.955 U2.7
NetC34_1: C34.1 U4.15 | length 6.1
  Top Layer w0.254: C34.1 22.606,17.485 25.105,17.485 25.527,17.907 26.416,17.907 26.67,17.653 28.179,17.653 U4.15
NetC34_2: C34.2 U4.14 | length 5.8
  Top Layer w0.2: C34.2 22.748,18.138 25.197,18.138 25.363,18.304 26.58,18.304 26.746,18.138 U4.14
NetC38_1: C38.1 U2.6 Y0.2 | length 5.8
  Top Layer w0.254: Y0.2 1.778,18.915 C38.1 2.318,18.455 U2.6
NetC41_1: C41.1 R48.2 U4.33 | length 10.3
  Top Layer w0.2: U4.33 37.756,13.138 38.24,12.654 38.24,12.289 39.037,11.491 40.139,11.491 40.378,11.252 41.156,11.252 41.45,11.546 41.632,11.546 41.633,11.545 42.457,11.545 42.969,12.057 43.053,12.057 R48.2 43.045,12.819 43.434,13.208 44.442,13.208 C41.1
NetC41_2: C41.2 R49.2 U4.32 | length 10.2
  Top Layer w0.2: U4.32 37.654,12.638 37.87,12.422 37.87,12.135 38.884,11.121 39.985,11.121 40.224,10.882 41.31,10.882 41.603,11.175 43.194,11.175 43.576,11.557 44.069,11.557 ; C41.2 44.069,11.819 44.069,11.557 ; R49.2 44.077,11.557 44.069,11.557
NetC42_1: C42.1 R51.2 U4.30 | length 7.5
  Top Layer w0.2: U4.30 37.211,11.638 38.707,10.142 41.616,10.142 41.784,10.31 42.022,10.31 C42.1 R51.2
NetC42_2: C42.2 R50.2 U4.31 | length 9
  Top Layer w0.2: U4.31 37.344,12.138 38.97,10.512 41.463,10.512 41.631,10.68 42.652,10.68 C42.2 R50.2
NetCN1_2: CN1.2 R120.1 U1.6 | length 5.2
  Top Layer w0.254: U1.6 15.582,33.73 R120.1 16.129,36.234 CN1.2
NetCN1_3: CN1.3 R120.2 U1.7 | length 5.2
  Top Layer w0.254: CN1.3 13.589,35.98 R120.2 14.224,35.345 U1.7
NetCN_2: CN.2 NTC.1 R2.2 U2.17 | length 7
  Top Layer w0.254: CN.2 4.783,7.739 R2.2 7.397,7.739 NTC.1 8.223,8.565 U2.17
NetD1_1: D1.1 R38.1 | length 1.6
  Top Layer w0.254: D1.1 R38.1
NetD2_1: D2.1 R37.1 | length 1.6
  Top Layer w0.254: D2.1 R37.1
NetD3_1: D3.1 R22.1 | length 1.6
  Top Layer w0.254: D3.1 R22.1
NetP1_1: P1.1 R6.1 | length 3
  Top Layer w0.35: P1.1 25.019,5.715
  Top Layer w0.45: 24.257,6.477 25.019,5.715
  Top Layer w0.5: 24.257,6.477 R6.1
NetP1_2: P1.2 R14.1 | length 3.3
  Top Layer w0.254: R14.1 25.273,7.576 25.273,7.239 25.669,6.843 P1.2
NetP1_3: P1.3 R15.1 | length 3.1
  Top Layer w0.254: R15.1 26.319,7.673 P1.3
NetP4_1: P4.1 R5.2 | length 9.6
  Top Layer w0.254: P4.1 3.175,33.147 3.937,32.385 3.937,26.67 R5.2
NetP5_2: P5.2 U2.49 | length 20.5
  Top Layer w0.2: U2.49 15.723,24.179 17.334,25.79 17.334,34.86 19.05,36.576 21.717,36.576 P5.2
NetP5_4: P5.4 U2.46 | length 30.1
  Top Layer w0.2: U2.46 16.113,19.955 15.748,20.32 15.748,21.336 16.891,22.479 16.891,24.765 17.704,25.578 17.704,34.707 19.185,36.187 26.408,36.187 P5.4
NetQ1_4: Q1.4 R28.2
NetQ2_1: Q2.1 R30.2 R50.1 R53.1 U4.44 | length 42.9
  Top Layer w0.254: U4.44 39.782,18.638 v1(40.259,18.161) ; v2(40.64,9.398) 41.656,8.382 44.405,8.382 44.92,8.897 44.92,9.622 R50.1 ; v2(50.673,31.623) 51.816,31.623 R53.1
  Signal Layer 1 w0.254: v2(40.64,9.398) 39.497,10.541 39.497,17.399 v1(40.259,18.161) 40.259,19.558 41.91,21.209 43.899,21.209 44.407,21.717 44.407,25.322 45.798,26.713 48.049,26.713 49.403,28.067 49.403,30.353 v2(50.673,31.623)
NetQ2_4: Q2.4 R29.2 R30.1
NetQ3_4: Q3.4 R34.2
NetQ4_4: Q4.4 R35.2 R36.2
NetQ5_4: Q5.4 R42.2
NetQ6_1: Q6.1 R46.2 R48.1 R54.1 U4.34 | length 26.8
  Top Layer w0.2: U4.34 37.779,13.638 38.61,12.807 38.61,12.442 39.191,11.861 40.292,11.861 40.531,11.622 41.003,11.622 41.446,12.065 R48.1 42.045,12.946 v2(42.037,12.954) ; v2(50.927,5.842) 50.927,4.699 51.435,4.191 R54.1
  Signal Layer 1 w0.2: v2(42.037,12.954) 50.038,12.954 50.927,12.065 v2(50.927,5.842)
NetQ6_4: Q6.4 R43.2 R46.1
NetR14_2: R14.2 U2.44 | length 17.1
  Top Layer w0.254: U2.44 20.288,18.955 v2(21.082,18.161) ; v2(25.273,9.652) 25.4,9.525 R14.2
  Signal Layer 1 w0.254: v2(21.082,18.161) 23.911,18.161 25.141,16.931 25.141,16.722 25.654,16.209 25.654,10.204 25.273,9.823 v2(25.273,9.652)
NetR15_2: R15.2 U2.45 | length 17.5
  Top Layer w0.254: U2.45 20.55,19.455 v2@20.574,19.431 ; v2(26.162,9.779) 26.289,9.652 R15.2
  Signal Layer 1 w0.254: v2(20.828,19.431) 20.955,19.304 23.368,19.304 25.565,17.107 25.565,16.898 25.915,16.548 26.124,16.548 26.162,16.51 v2(26.162,9.779)
NetR17_1: R17.1 R18.2 U4.3 | length 13.8
  Top Layer w0.254: R18.2 19.693,28.575 R17.1 19.558,28.456 19.558,25.146 21.066,23.638 U4.3
NetR20_1: R20.1 U4.7 | length 5
  Top Layer w0.2: R20.1 23.693,21.638 U4.7
NetR21_2: R21.2 U4.1 | length 6.4
  Top Layer w0.254: R21.2 22.352,25.273 22.987,24.638 U4.1
NetR23_2: R23.2 R24.2 U2.16 | length 4.1
  Top Layer w0.254: R23.2 6.223,10.66 ; U2.16 6.223,10.66 ; R24.2 6.223,10.66
NetR25_2: R25.2 U4.49 | length 5.5
  Top Layer w0.254: U4.49 40.227,21.138 R25.2
NetR26_2: R26.2 R27.2 U2.15 | length 5.7
  Top Layer w0.254: R27.2 R26.2 4.521,12.923 5.5,13.902 6.17,13.902 U2.15
NetR28_1: R28.1 U4.47 | length 33.1
  Top Layer w0.254: U4.47 36.47,20.214 40.873,20.214 40.879,20.208 41.925,20.208 42.164,20.447 v2(42.291,20.447) v2@42.291,20.32 ; v2(50.038,29.337) 50.038,38.1 51.181,39.243 R28.1
  Signal Layer 1 w0.254: v2(42.291,20.447) 43.942,20.447 44.831,21.336 44.831,25.146 45.974,26.289 48.26,26.289 50.038,28.067 v2(50.038,29.337)
NetR29_1: R29.1 U4.45 | length 21.5
  Top Layer w0.254: U4.45 40.349,19.138 40.879,18.608 42.23,18.608 44.069,20.447 44.069,25.781 45.847,27.559 R29.1
NetR32_2: R32.2 R33.2 U2.14 | length 8.3
  Top Layer w0.254: R32.2 R33.2 1.93,11.278 1.905,11.303 2.159,11.557 3.716,11.557 4.097,11.938 4.097,13.099 5.4,14.402 6.17,14.402 U2.14
NetR34_1: R34.1 U4.42 | length 22.2
  Top Layer w0.254: U4.42 39.338,17.638 39.836,17.14 40.981,17.14 41.479,17.638 44.054,17.638 44.958,18.542 44.958,24.892 46.228,26.162 50.712,26.162 R34.1
NetR35_1: R35.1 U4.40 | length 15.1
  Top Layer w0.254: U4.40 39.139,16.638 39.709,16.068 45.4,16.068 46.355,15.113 49.149,15.113 49.53,14.732 R35.1
NetR37_2: R37.2 U2.24 | length 5.8
  Top Layer w0.254: R37.2 11.041,6.342 11.723,7.024 U2.24
NetR38_2: R38.2 U2.25 | length 5.2
  Top Layer w0.254: U2.25 12.223,6.438 R38.2
NetR42_1: R42.1 U4.37 | length 16.2
  Top Layer w0.254: U4.37 38.075,15.138 39.355,13.858 40.401,13.858 41.529,14.986 44.069,14.986 46.101,12.954 R42.1
NetR43_1: R43.1 U4.35 | length 26.5
  Top Layer w0.254: U4.35 37.84,14.138 39.007,12.972 39.007,12.606 39.355,12.258 40.701,12.258 v2(40.767,12.192) ; v2(50.038,5.08) 50.038,1.651 50.419,1.27 R43.1
  Signal Layer 1 w0.254: v2(40.767,12.192) 49.53,12.192 50.292,11.43 50.292,5.334 v2(50.038,5.08)
NetR402_1: R402.1 U1.8 | length 2.8
  Top Layer w0.254: R402.1 10.186,33.642 U1.8
NetU1_1: U1.1 U2.62 | length 8.5
  Top Layer w0.254: U2.62 9.223,24.463 10.711,25.951 12.616,25.951 12.954,26.289 U1.1
NetU1_4: U1.4 U2.61 | length 12.1
  Top Layer w0.254: U2.61 9.723,24.328 10.922,25.527 16.51,25.527 16.764,25.781 U1.4
NetU2_8: U2.8
NetU2_20: U2.20
NetU2_21: U2.21
NetU2_22: U2.22
NetU2_23: U2.23
NetU2_26: U2.26 U4.26 | length 20.4
  Top Layer w0.254: U2.26 12.723,8.359 v2(13.081,8.001) ; v2(25.019,10.795) 26.362,12.138 U4.26
  Signal Layer 1 w0.254: v2(13.081,8.001) 13.373,8.293 21.974,8.293 24.476,10.795 v2(25.019,10.795)
NetU2_27: U2.27 U4.25 | length 18.9
  Top Layer w0.254: U2.27 13.223,9.129 v2(13.462,8.89) ; v2(24.765,11.684) 25.146,11.684 26.1,12.638 U4.25
  Signal Layer 1 w0.254: v2(13.462,8.89) 21.971,8.89 v2(24.765,11.684)
NetU2_33: U2.33 U4.12 | length 22.3
  Top Layer w0.2: v2@24.511,19.431 v2(24.657,19.285) 24.804,19.138 U4.12
  Top Layer w0.254: U2.33 19.438,13.455 v2(19.685,13.208)
  Signal Layer 1 w0.254: v2(19.685,13.208) 19.177,12.7 18.161,12.7 17.907,12.954 17.907,19.558 18.542,20.193 24.257,20.193 24.657,19.793 v2(24.657,19.285)
NetU2_34: U2.34 U4.22 | length 10.8
  Top Layer w0.254: U2.34 17.738,13.97 20.828,13.97 21.017,14.159 24.068,14.159 24.346,13.881 25.266,13.881 25.523,14.138 U4.22 U4.22@28.194,14.159
NetU2_35: U2.35 U4.20 | length 10.8
  Top Layer w0.254: U2.35 20.551,14.455 21.234,15.138 U4.20
NetU2_36: U2.36 U4.18 | length 11.4
  Top Layer w0.254: U2.36 17.754,14.986 20.32,14.986 21.472,16.138 23.504,16.138 24.003,16.637 25.226,16.637 25.739,16.124 28.18,16.124 U4.18
NetU2_41: U2.41 U4.21 | length 11.8
  Top Layer w0.254: U2.41 18.994,17.455 v2(19.939,16.51) ; v1@25.019,14.638 U4.21
  Signal Layer 1 w0.254: v2(19.939,16.51) 20.447,16.002 23.622,16.002 25.019,14.605 v1(25.019,14.478)
NetU2_42: U2.42 U4.19 | length 11.4
  Top Layer w0.254: U2.42 19.383,17.955 v2(19.939,17.399) ; 25.273,15.714 25.349,15.638 U4.19
  Signal Layer 1 w0.254: v2(19.939,17.399) 24.074,17.399 24.717,16.756 24.717,16.546 25.019,16.244 v1(25.019,15.875)
NetU2_43: U2.43 U4.17 | length 11.7
  Top Layer w0.254: U2.43 19.772,18.455 21.589,16.638 23.369,16.638 23.749,17.018 23.784,17.018 23.827,17.061 25.449,17.061 25.565,16.945 25.565,16.898 25.915,16.548 26.409,16.548 26.499,16.638 U4.17
NetU2_51: U2.51 U4.16 | length 17.5
  Top Layer w0.254: U2.51 14.723,21.218 v2(15.113,20.828) ; 26.543,17.145 26.55,17.138 U4.16
  Signal Layer 1 w0.254: v2(15.113,20.828) 24.222,20.828 25.254,19.795 25.254,18.053 v2(26.162,17.145)
NetU2_52: U2.52
NetU2_53: U2.53 U4.6 | length 17.5
  Top Layer w0.2: v2(24.638,22.352) 24.852,22.138 U4.6
  Top Layer w0.254: U2.53 13.723,21.202 v2(14.351,20.574)
  Signal Layer 1 w0.2: v2(14.351,20.574) 14.351,20.955 14.859,21.463 23.749,21.463 v2(24.638,22.352)
NetU2_58: U2.58
NetU2_59: U2.59
VCC: *4.5 C10.2 C11.2 C12.2 C13.2 C14.2 C24.1 C25.1 C31.2 C35.2 C401.2 NTC.2 P5.1 R22.2 RT.2 U1.3 U2.1 U2.13 U2.19 U2.32 U2.48 U2.64 U4.9 U4.24 | length 43
  Top Layer w0.254: RT.2 4.152,15.125 C14.2 4.298,14.955 U2.13 ; v1(4.953,20.955) U2.1 ; U2.64 8.223,24.733 8.636,25.146 8.636,27.864 C11.2 C13.2 ; U2.19 9.223,8.391 NTC.2 9.486,3.898 C24.1 ; R22.2 14.359,6.342 v1(14.859,5.842) 14.859,4.445 15.428,3.876 *4.5 ; v2(15.494,30.734) U1.3 v1(15.494,27.559) 15.494,26.746 C401.2 ; U2.32 17.602,11.455 C10.2 19.888,11.633 v1(20.193,11.938) ; C12.2 17.723,23.984 U2.48 ; v2(24.892,12.7) 25.019,12.573 25.273,12.573 25.838,13.138 U4.24 ; v2(25.654,20.574) 25.718,20.638 U4.9
  other v1: 15.621,3.937 9.525,4.445 16.637,11.455 4.953,14.955 4.152,15.748 17.723,22.225 17.723,22.987 8.636,26.797 8.56,28.765
  other v2: 16.51,1.397 16.51,2.159 9.144,9.906
pads on no net: U1.5 U2.2 U2.3 U2.4 U2.9 U2.11 U2.28 U2.29 U2.30 U2.37 U2.38 U2.39 U2.40 U2.50 U2.54 U2.55 U2.56 U4.4 U4.5 U4.55 U4.56

## Polygon pours and split planes (outlines as drawn)
VCC on Signal Layer 2 "Bottom Layer-No Net" (solid, remove dead copper, pour order 0): 34.925,40.005 34.417,40.513 -0.254,40.513 -0.254,2.032 1.905,-0.127 2.159,0.127 35.052,0.127
GND on Top Layer "Bottom Layer-No Net" (solid, remove dead copper, pour order 2): 0.127,40.132 0.127,0.508 -0.254,0.127 -0.127,0 68.834,0 68.834,37.719 66.421,40.132 66.294,40.259 66.04,40.259

## Keep-outs
Keep-Out Layer:
  lines w0.254: 65.532,40.132 cw(c65.532,36.83) 68.834,36.83 ; 65.786,40.132 2.032,40.132 ccw(c2.032,37.973) -0.127,37.973 -0.127,3.175 ccw(c3.048,3.175) 3.048,0 65.786,0 ccw(c65.786,3.048) 68.834,3.048 68.834,37.084

## Other copper
Top Layer:
  rectangle net +5V: 19.685,33.782 36.449,35.814
  rectangle net GND: 36.957,36.703 40.005,38.1
  rectangle net +5V: 32.639,34.925 33.909,37.211
  rectangle net GND: 26.289,26.797 28.067,28.702
  rectangle net GND: 21.709,27.559 24.892,28.194
  rectangle net GND: 28.956,20.066 30.607,20.193
  rectangle net GND: 31.115,7.493 33.655,15.367
  rectangle net GND: 30.226,5.207 34.417,9.271
  rectangle net GND: 28.956,2.286 29.337,3.683
  rectangle net GND: 23.368,1.524 29.464,2.159
  rectangle net GND: 23.114,2.54 23.622,3.81
  rectangle net GND: 19.812,1.651 22.352,2.159
  rectangle net GND: 19.812,4.572 23.368,4.953
  rectangle net +5V: 20.193,5.776 20.574,7.874
  rectangle net VCC: 16.764,2.159 17.369,3.876
  rectangle net NetC1_2: 36.394,8.89 37.084,11.138
  rectangle net NetC1_2: 35.814,23.114 39.624,23.638
  rectangle net NetC1_2: 39.624,23.114 41.021,28.575
  rectangle net NetC27_2: 29.718,27.051 34.798,28.702
  rectangle net NetC27_2: 33.274,21.59 34.798,28.702
  rectangle net NetC27_2: 33.782,21.59 36.957,22.225
  rectangle net GND: 38.481,31.496 43.434,33.655
  rectangle net NetC1_2: 39.497,28.448 44.196,29.972
  rectangle net NetC1_2: 44.196,28.448 45.72,37.973
  rectangle net NetC1_2: 45.212,37.846 49.403,39.116
  rectangle net +5V: 24.892,33.782 36.449,35.814
  rectangle net GND: 25.019,27.178 26.543,32.004
  rectangle net GND: 25.019,29.972 30.861,32.004
  rectangle net GND: 38.481,33.655 40.767,35.687
  rectangle net GND: 42.545,0.889 49.403,5.715
  rectangle net NetC1_2: 36.195,1.016 38.481,9.271
  rectangle net GND: 46.355,2.413 49.403,11.049
  rectangle net GND: 46.355,15.748 49.784,24.13
  rectangle net GND: 46.228,28.067 49.149,37.592
  rectangle net NetQ5_4: 62.611,11.811 63.754,12.7
  rectangle net NetQ5_4: 52.324,12.7 63.754,13.335
  rectangle net NetQ3_4: 62.865,25.146 63.754,25.908
  rectangle net NetQ3_4: 52.451,25.908 63.754,26.416
  rectangle net NetQ1_4: 62.738,37.973 63.627,39.497
  rectangle net NetQ1_4: 54.991,38.989 63.627,39.497
  rectangle net NetQ2_4: 52.451,27.432 57.912,28.067
  rectangle net NetQ4_4: 52.324,14.351 57.658,14.986
  rectangle net NetQ6_4: 52.832,1.016 57.277,1.651
  rectangle net NetQ6_1: 52.07,2.286 58.166,5.842
  rectangle net NetC30_2: 64.77,4.318 68.326,11.049
  rectangle net NetC30_2: 61.722,0.889 64.77,11.049
  rectangle net NetC1_2: 51.562,6.985 61.214,11.303
  rectangle net GND: 48.006,15.621 58.166,18.796
  rectangle net NetC28_2: 64.643,27.178 68.199,35.306
  rectangle net NetQ2_1: 52.07,28.702 58.039,32.131
  rectangle net NetC29_2: 62.103,14.224 68.199,24.003
  rectangle net NetC1_2: 52.324,19.812 61.341,24.13
  rectangle net NetC1_2: 51.562,19.812 53.086,23.495
  rectangle net NetC1_2: 52.07,33.401 61.214,37.719
  rectangle net NetC28_2: 61.722,27.178 64.643,37.338
Signal Layer 2:
  rectangle net NetC1_2: 53.975,0.762 58.293,38.1
  rectangle net NetC1_2: 36.068,0.762 58.293,4.572
  rectangle net GND: 46.482,6.985 48.895,37.084
  rectangle net NetC29_2: 64.516,14.478 68.199,23.114
  rectangle net NetC30_2: 65.151,4.699 68.072,10.922
  rectangle net NetC28_2: 65.151,28.321 67.564,34.163
Bottom Layer:
  rectangle net GND: 17.145,27.305 25.273,31.877
  rectangle net NetC1_2: 17.145,0.762 22.86,8.128
  rectangle net GND: 22.479,27.94 26.797,31.496
  rectangle net NetC1_2: 17.78,4.318 22.479,4.445
  rectangle net GND: 22.098,23.114 29.972,23.876
  rectangle net GND: 19.685,22.479 22.098,23.876
  rectangle net NetC1_2: 51.689,37.719 61.849,39.243
  rectangle net NetC1_2: 42.672,37.719 51.689,39.243
  rectangle net GND: 24.892,26.67 30.353,32.131
  rectangle net NetC30_2: 64.77,4.445 68.326,10.922
  rectangle net NetC29_2: 64.008,14.351 68.199,23.876
  rectangle net NetC28_2: 64.643,27.305 68.199,35.179
  rectangle net NetC1_2: 17.526,0.762 61.849,4.318
  rectangle net NetC1_2: 51.562,4.318 61.849,38.227
  rectangle net GND: 29.718,5.207 49.403,8.636
  rectangle net GND: 42.926,4.953 49.403,30.988
  rectangle net GND: 31.369,27.051 49.403,36.195
  rectangle net GND: 29.718,5.334 34.036,36.195

## Silkscreen, mask and mechanical layers (free items; w line width, h text height)
Top Overlay:
  text "SWD" at 23.495,35.306 h1.52
  text "PWM" at 3.048,32.766 h1.52 r270
  text "CAN" at 19.558,30.353 h1.52 r90
  text "Solodros" at 49.657,16.764 h1
Bottom Overlay:
  text "GND" at 21.971,25.527 h1.52
  text "VCC" at 21.59,8.382 h1.52
Top Paste:
  rectangle: 64.897,4.572 68.199,10.922
  rectangle: 64.516,14.732 67.945,23.114
  rectangle: 64.77,27.686 68.072,34.036
Bottom Solder:
  rectangle: 65.278,28.321 67.564,33.655
  rectangle: 65.151,15.113 67.564,22.606
  rectangle: 65.532,5.08 67.818,10.541
  rectangle: 19.304,2.286 21.336,4.699
  rectangle: 56.515,1.397 60.198,38.481
  rectangle: 18.288,1.397 60.198,3.302